# Altium PCB RT_SUPER_B1.PCBdoc (part 3 of 3)
Units mil, origin at the board's own origin, x right, y up, seen from the top; angles counter-clockwise.
Board outline 1617.06 x 1691.18 mil, 4 copper layers (Top Layer, GND, PWR, Bottom Layer), stack 39.556 mil thick; 138 components, 99 nets, 466 pads, 206 vias.
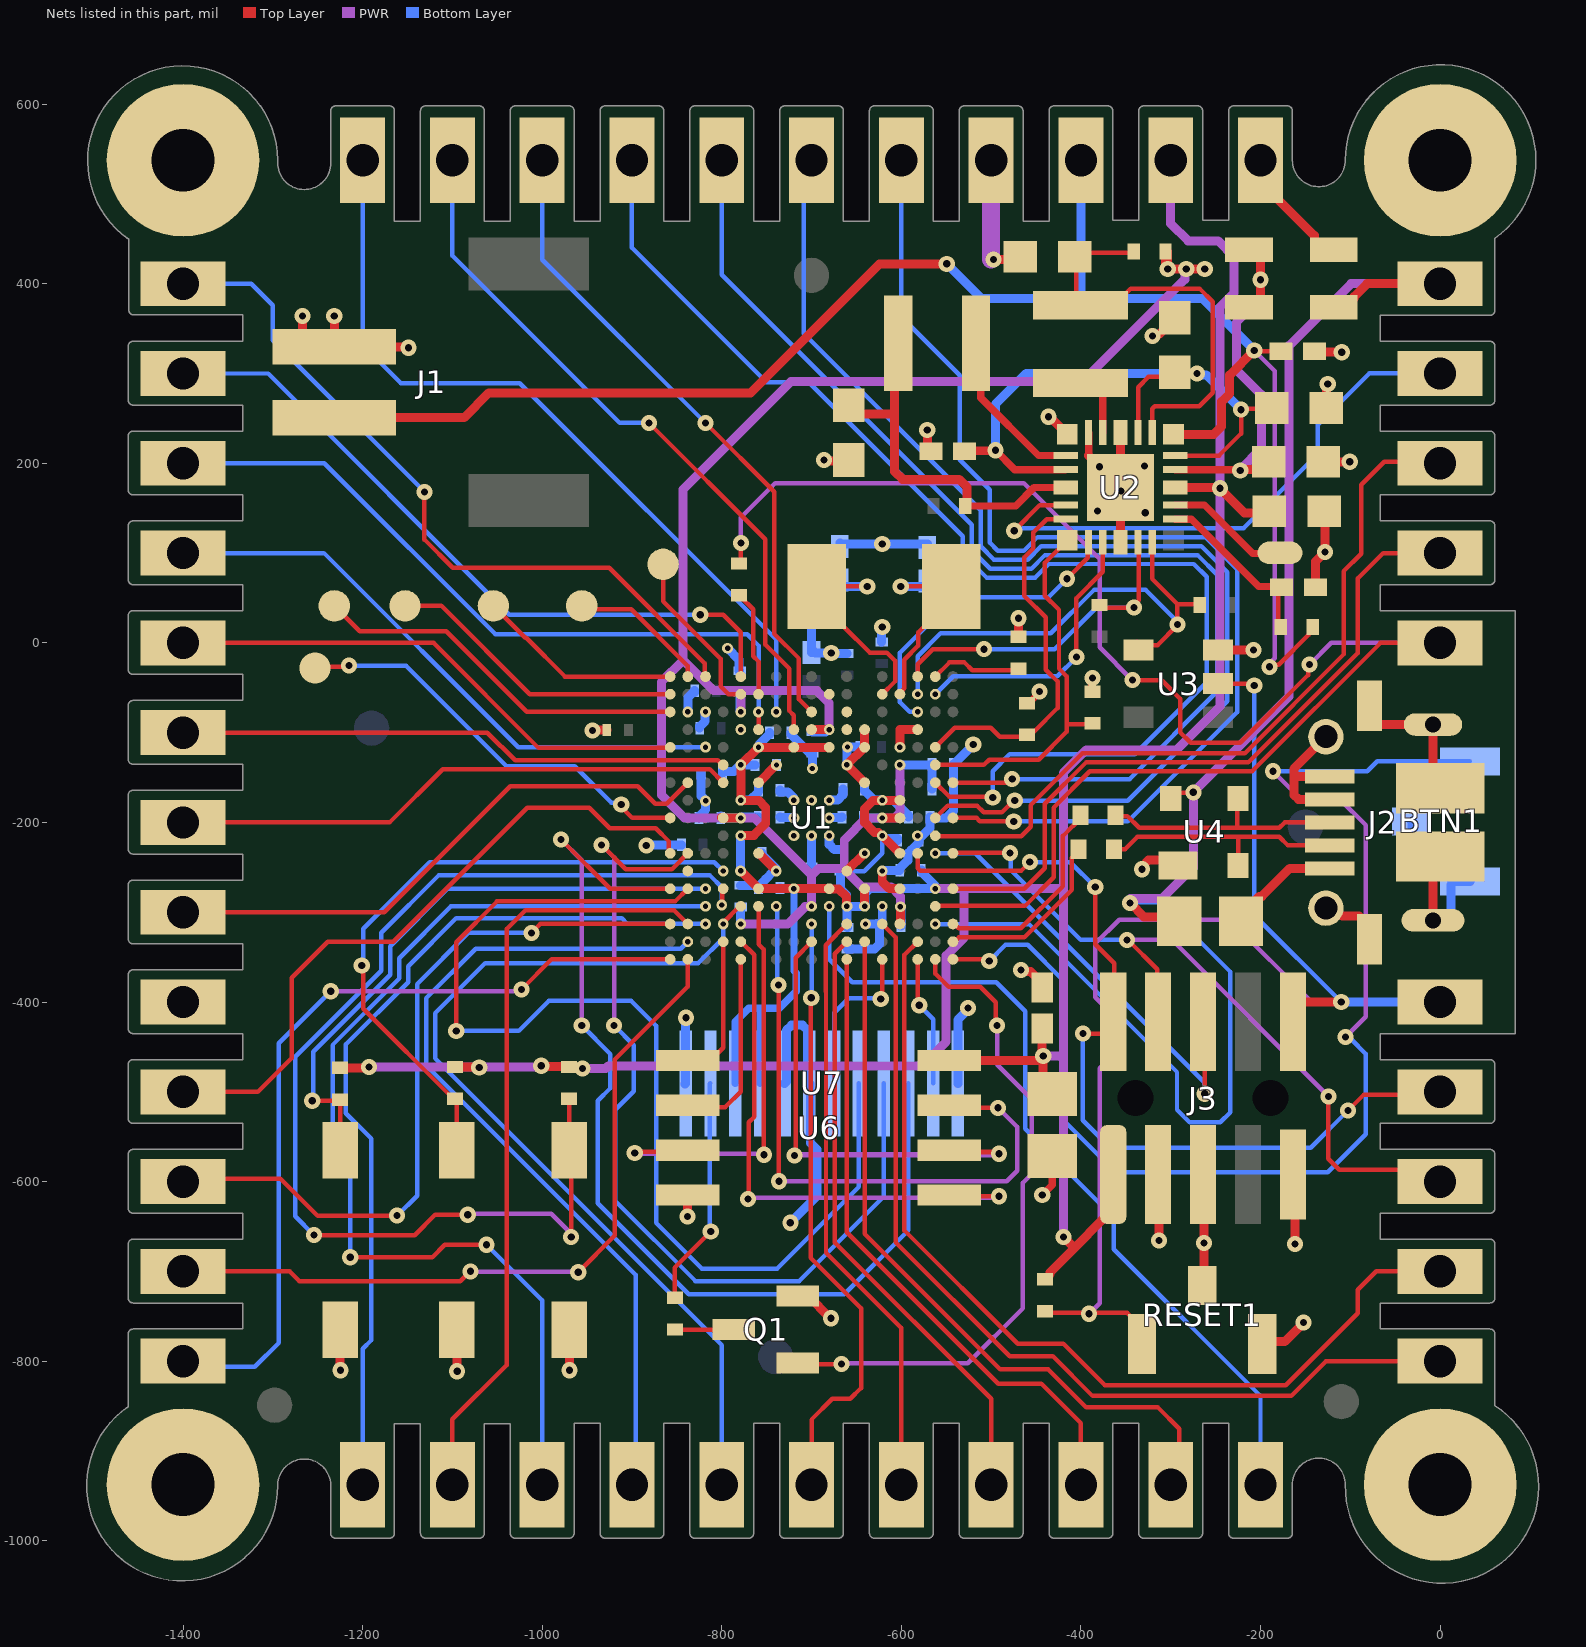
[diagram p4: the nets of this part, all layers, seen from the top]

## Via types
v1: diameter 18, hole 8, Top Layer to Bottom Layer, tented both sides, 133 vias
v2: diameter 12, hole 6, Top Layer to Bottom Layer, tented both sides, 73 vias

## Nets (pads, with @x,y where several pads share a name; then routed paths per layer and width w, separated by ;. In a path a pad name is that pad's centre, name@x,y a point inside that pad or via, vN(x,y) a via of type N, cw(c..) or ccw(c..) an arc to the next point about the centre after c; other vN are vias at no path point) (continued)
+3v3: C12.2 C13.2 C14.2 C15.2 C16.2 C17.2 C18.2 C20.2 C21.2 C22.2 C23.2 C24.2 C25.2 C42.2 C43.1 J3.1 P10.1 R3.2 R4.2 R8.2 R12.2 R13.2 R14.2 U1.E6 U1.E8 U1.E10 U1.F5 U1.H5 U1.H13 U1.H14 U1.K5 U1.K13 U1.L14 U1.M5 U1.N6 U1.N8 U1.N10 U1.N12 U1.N16 U1.P11 U1.P12 U2.15 U6.8 U7.3 U7.4 | length 4300.1
  Top Layer w8: R3.2@-459.84,-67.05 -457.87,-67.05 -450.67,-59.85 -450.67,-58.67 v1(-446,-54) ; R4.2@-387.01,-54.25 -388,-53.26 -388,-40 v1(-387,-39)
  Top Layer w10: R12.2@-1225,-473.28 -1194,-473.28 v1(-1193,-472.28) ; R13.2@-1097,-472.28 -1070.72,-472.28 v1(-1070,-473) ; v1(-1001,-471) -1000.36,-471.64 -970.64,-471.64 -969.06,-473.23 -956.11,-473.23 v1(-955.17,-474.17) ; v2(-779,-254) U1.M5@-778.74,-254.06 U1.M5@-778.74,-254.06 U1.N6@-759.06,-273.74 v2(-719.68,-273.74) U1.N10@-680.31,-273.74 -679.93,-274.12 -669.88,-274.12 -661.01,-282.99 -661.01,-293.04 v2(-660.63,-293.43) ; v2(-778.74,-214.69) -778.36,-214.3 -764.3,-214.3 -751,-201 -751,-183.37 -759.06,-175.32 v2(-778.74,-175.32) v2(-778.74,-135.94) v2(-759.06,-116.26) U1.E8@-719.68,-116.26 U1.E10@-680.31,-116.26 ; v2(-640.94,-293.43) U1.N12@-640.94,-273.74 ; U1.K13@-625.49,-211 -629.94,-211 -640.94,-200 -640.94,-184.94 -631.7,-175.7 -621.64,-175.7 v2(-621.26,-175.32) U1.H14@-601.57,-175.32 ; v2(-621.26,-214.69) U1.L14@-601.57,-234.37 ; U6.8@-546.46,-465 v1@-442,-465 ; v1@-443.11,-458 C43.1@-443.11,-429.25 ; C42.2@-442,-482.94 v1(-442,-460) ; C42.2@-441.8,-484.75 C42.2@-427,-499.55 ; R8.2@-439.93,-706.58 -440.16,-706.81 -438.19,-706.81 -434.33,-702.95 -434.33,-700.98 -408.17,-674.82 ; v1(-419.49,-661.54) -408.17,-672.85 -408.17,-674.82 ; J3.1@-363,-593 -363,-632.28 -372.33,-641.61 -374.96,-641.61 -408.17,-674.82 ; U2.15@-294.96,173.2 -246.35,173.2 -233.22,160.07 -218,144.85 -191.84,144.85 C18.2@-190.16,146.54
  PWR w10: v1(-1193,-472.28) -1002.28,-472.28 v1(-1001,-471) ; v1(-955.17,-474.17) -929.33,-474.17 -926.17,-471 -577,-471 -550,-444 -550,-348.37 -530,-328.37 -530,-273.74 ; v2(-562.2,-273.74) -530,-273.74 ; v1(-442,-460) -423.49,-460 -419.49,-464 ; v1(-419.49,-661.54) -419.49,-464 ; P10.1@-300,537.5 -300,467.01 -280.71,447.72 -247.24,447.72 -229.53,430 -229.53,389.58 -244.98,374.13 -244.98,175.82 -245.28,175.52 -245.28,-70.98 -293.5,-119.21 -394,-119.21 -419.49,-144.7 -419.49,-274 ; -530,-273.74 -419.75,-273.74 -419.49,-274 ; -419.49,-464 -419.49,-274
  Bottom Layer w5: C15.2@-667.52,-254.24 -641.25,-254.24 -621.26,-234.26 v2(-621.26,-214.69)
  Bottom Layer w8: U7.3@-785.03,-490.5 -785.03,-422.03 -770,-407 -758,-407 ; U7.4@-757.47,-490.5 -757.47,-407.53 -758,-407 ; v2(-719.68,-273.74) -719.68,-365.32 -717,-368 -717,-388 -736,-407 -758,-407
  Bottom Layer w10: C16.2@-799,-145 -799,-143.19 -798.92,-143.11 -786.45,-143.11 -779.28,-135.94 v2(-778.74,-135.94) ; v2(-779,-254) C20.2@-779,-234 -778.92,-233.92 -778.92,-214.87 v2(-778.74,-214.69) ; v2(-778.74,-175.32) -778.36,-174.93 -768.12,-174.93 -759,-165.81 C21.2@-759,-164 -759,-162.19 C21.2@-759.08,-162.11 ; v2(-778.74,-135.94) C13.2@-763.03,-135.97 ; v2(-759.06,-116.26) -758.67,-115.88 -758.67,-113.48 -747,-101.81 C17.2@-747,-100 ; C24.2@-735,-273 -735,-273.29 -734.92,-273.37 -720.06,-273.37 v2(-719.68,-273.74) ; C15.2@-667.52,-254.24 -667.52,-274.32 -661.01,-280.83 -661.01,-293.04 v2(-660.63,-293.43) ; C12.2@-660,-317 -660.63,-316.37 v2(-660.63,-293.43) ; C22.2@-641,-163 -641,-164.81 -630.88,-174.93 -621.64,-174.93 v2(-621.26,-175.32) -620.88,-175.7 -608.61,-175.7 -592.12,-192.19 C25.2@-592.12,-194 ; v2(-621.26,-214.69) -620.72,-214.69 -617.29,-218.11 -604.2,-218.11 -604.12,-218.19 C23.2@-604.12,-220 ; C14.2@-577.76,-253.07 -577.76,-254.88 -562.59,-270.06 -562.59,-273.36 v2(-562.2,-273.74) -635.09,-273.74 -640.56,-279.22 -640.56,-293.04 v2(-640.94,-293.43) v2(-660.63,-293.43)
  other v1: -245.28,172.13
+5vUSB: D2.1 L1.2 P12.1 U1.R16 U4.4 | length 1874.8
  Top Layer w5: U4.4@-299.87,-167 -275.35,-167 v1(-274.8,-166.46) ; L1.2@-295.13,-305.32 L1.2@-290.45,-310
  Top Layer w10: v1(-345.24,-289.57) -329.49,-305.32 L1.2@-295.13,-305.32 ; D2.1@-118.31,373.9 -105.51,373.9 -95.73,383.68 -95.73,385.59 -81.32,400 P12.1@0,400
  PWR w10: v1@-344.68,-284.57 -309.25,-284.57 -274.8,-250.12 v1(-274.8,-166.46) -168,-59.65 -168,331.09 -99.09,400 P12.1@0,400
  Bottom Layer w5: v2(-562.2,-313.11) -457.87,-313.11 -293,-477.98 -293,-520 -279,-534 -244.71,-534 -233.46,-522.76 -233.46,-366.54 -311,-289 -344.67,-289 v1(-345.24,-289.57)
+VBATT: C4.2 J1.2 P9.1 R6.2 U2.18 | length 1904.1
  Top Layer w5: v1@-204.94,324.7 C4.2@-181.13,324.7 ; v1(-190.16,-26.69) -187.67,-24.21 -179.8,-24.21 -146.32,9.27 -139.96,15.63 R6.2@-139.96,17.6
  Top Layer w10: J1.2@-1231.5,250.87 -1086.81,250.87 -1059.25,278.43 -767.91,278.43 -624.21,422.13 v1(-549.41,422.13) ; U2.18@-296.93,232.26 -252.07,232.26 -243.31,241.02 -243.31,268.58 -234.45,277.44 -234.45,298.11 v1(-206.89,325.67)
  PWR w5: v1(-206.89,325.67) -184,302.78 -184,-17.02 -190.16,-23.18 v1(-190.16,-26.69)
  Bottom Layer w10: v1(-549.41,422.13) -511.02,383.74 -400,383.74 ; P9.1@-400,537.5 -400,383.74 ; v1(-206.89,325.67) -264.96,383.74 -400,383.74
+VBATT_BU: C3.2 R6.1 U2.13 | length 190.4
  Top Layer w5: C3.2@-180.31,61.89 -180.31,18.58 R6.1@-179.33,17.6
  Top Layer w8: U2.13@-294.96,137.77 -276.86,137.77 -201.97,62.87 C3.2@-180.31,62.87
+VIN: D1.1 P11.1 | length 141
  Top Layer w10: P11.1@-200,537.5 -180,517.5 -180,493.66 -139.88,453.54 -139.88,446.65 -131.1,437.87 D1.1@-118.31,437.87
ADC0_0: P43.1 U1.F4 | length 616.5
  Top Layer w5: P43.1@-1400,-100 -1061,-100 -1030.13,-130.87 -804.59,-130.87 -799.51,-135.94 U1.F4@-798.43,-135.94
ADC0_1: P45.1 U1.E3 | length 671.5
  Bottom Layer w5: P45.1@-1400,100 -1243,100 -1026.74,-116.26 -818.26,-116.26 v2(-818.11,-116.11)
ADC0_8: P44.1 U1.E1 | length 591.3
  Top Layer w5: P44.1@-1400,0 -1121,0 -1004,-117 -858.22,-117 U1.E1@-857.48,-116.26
BTN: BTN1.2 U1.U17 | length 1398.9
  Top Layer w5: U1.U17@-542.52,-352.48 -504.13,-352.48 v1(-502.17,-354.45)
  PWR w5: v1(-186,-143.05) -154.97,-174.09 -111.64,-174.09 -82.87,-202.85 -82.87,-416.46 v1(-105.51,-439.09)
  Bottom Layer w5: v1(-502.17,-354.45) -483.99,-336.28 -459.31,-336.28 -420,-375.59 -420,-531.1 -361.42,-589.69 -125.2,-589.69 -82.87,-547.36 -82.87,-457.8 -99.61,-441.06 -103.54,-441.06 v1(-105.51,-439.09) ; v1(-186,-143.05) -81.05,-143.05 -70.01,-132.01 BTN1.2@33.27,-132.01
DEBUG_RX_IN: P42.1 U1.G4 | length 632.2
  Top Layer w5: P42.1@-1400,-200 -1170,-200 -1110.87,-140.87 -813.19,-140.87 U1.G4@-798.43,-155.63
DEBUG_TX_OUT: P41.1 U1.G2 | length 638.1
  Top Layer w5: P41.1@-1400,-300 -1176.06,-300 -1035.63,-159.57 -893.51,-159.57 -874.08,-179 -861.17,-179 U1.G2@-837.8,-155.63
DM_MCU: R9.2 U1.T17 | length 206.5
  Top Layer w5: U1.T17@-542.52,-332.8 -540.63,-332.8 -535.83,-328 -462.92,-328 -410,-275.08 -410,-239.29 -407.07,-236.36 -405.11,-236.36 -400.72,-231.97 R9.2@-400.72,-230
DP_MCU: R11.2 U1.R17 | length 231.9
  Top Layer w5: U1.R17@-542.52,-313.11 -540.98,-313.11 -536.09,-318 -467.06,-318 -420,-270.94 -420,-215 -409.37,-204.37 -409.11,-204.37 -398.72,-193.97 R11.2@-398.72,-192
FC2_CLK: P48.1 U1.A3 | length 830
  Top Layer w5: v1(-1131.1,168.19) -1131.1,115.04 -1099.61,83.54 -925.39,83.54 -818.97,-22.88 -818.97,-36.66 U1.A3@-818.11,-37.52
  PWR w5: P48.1@-1400,400 P48.1@-1396.57,403.43
  Bottom Layer w5: P48.1@-1400,400 -1324,400 -1300,376 -1300,337.09 v1(-1131.1,168.19)
FC2_SDA: P46.1 U1.D6 | length 818.6
  Top Layer w5: U1.D6@-759.06,-96.57 v2(-759.06,-76.89)
  Bottom Layer w5: P46.1@-1400,200 -1242.64,200 -1052.08,9.44 -771.44,9.44 -759.06,-2.94 v2(-759.06,-76.89)
FC2_WS: P47.1 U1.A5 | length 789.9
  Top Layer w5: v1(-824.02,31.38) -798.43,31.38 -778.74,11.69 U1.A5@-778.74,-37.52
  Bottom Layer w5: P47.1@-1400,300 -1305.24,300 -1036.61,31.38 v1(-824.02,31.38)
FC3_CLK: P1.1 U1.C7 | length 885.6
  Top Layer w20: P1.1@-1200,537.5 P1.1@-1198,535.5
  Bottom Layer w5: P1.1@-1200,537.5 -1200,332 -1157.25,289.25 -1024.8,289.25 -739.37,3.82 v2(-739.37,-76.89)
FC3_SDA: P3.1 U1.C9 | length 738.7
  Top Layer w5: v1(-818.11,244.96) -741.41,168.26 -741.41,9.93 -714,-17.48 -714,-62.89 U1.C9@-700,-76.89
  Bottom Layer w5: P3.1@-1000,537.5 -1000,426.85 v1(-818.11,244.96)
FC3_WS: P2.1 U1.D8 | length 810.6
  Top Layer w5: v1(-881.1,244.96) -751.41,115.27 -751.41,-1.85 -724.61,-28.66 -724.61,-75.86 -719.68,-80.78 U1.D8@-719.68,-96.57
  Bottom Layer w5: P2.1@-1100,537.5 -1100,431.38 -913.58,244.96 v1(-881.1,244.96)
FC4_CLK: U1.D11
FC4_SDA: U1.C11
FC4_WS: U1.B10
FC5_RXD: P6.1 U1.J16 | length 1342.9
  Top Layer w5: U1.J16@-562.2,-195 -548.58,-181.38 -515.64,-181.38 -508.39,-188.63 -487.92,-188.63 -474.96,-175.67 v1(-473.74,-175.67)
  Bottom Layer w5: P6.1@-700,537.5 -708.44,529.06 -708.44,344.44 -511.69,147.69 -511.69,107.58 -496.83,92.72 -459.27,92.72 -444.15,107.83 -265.99,107.83 -237,78.84 -237,-65 -347.67,-175.67 v1(-473.74,-175.67)
FC5_SCK: P4.1 U1.G16 | length 1410
  Top Layer w5: U1.G16@-562.2,-155.63 -546.46,-171.38 -498.98,-171.38 v1(-498.23,-172.13)
  Bottom Layer w5: P4.1@-900,537.5 -900,440.04 -750.2,290.24 -703.24,290.24 -531.69,118.69 -531.69,99.29 -505.12,72.72 -450.98,72.72 -435.87,87.83 -274.28,87.83 -260,73.56 -260,-44 -340.13,-124.13 -479.53,-124.13 -498.23,-142.83 v1(-498.23,-172.13)
FC5_SSEL0: P7.1 U1.J17 | length 1294.6
  Top Layer w5: U1.J17@-542.52,-195 -516.16,-195 -512.53,-198.63 -475.13,-198.63 v1(-474.86,-198.9)
  Bottom Layer w5: P7.1@-600,537.5 -600,363.07 -535,298.07 -535,204 -501.69,170.69 -501.69,111.72 -492.69,102.72 -463.41,102.72 -448.29,117.83 -261.85,117.83 -226,81.98 -226,-77 -347.63,-198.63 -474.59,-198.63 v1(-474.86,-198.9)
FC5_TXD: P5.1 U1.G17 | length 1311.1
  Top Layer w5: U1.G17@-542.52,-155.63 v1@-482.63,-155.63 ; v1@-481,-154 -478.69,-151.69 v1(-476.57,-151.69)
  Bottom Layer w5: P5.1@-800,537.5 -800,410 -521.69,131.69 -521.69,103.43 -500.98,82.72 -455.13,82.72 -440.01,97.83 -270.13,97.83 -248,75.7 -248,-54 -345.69,-151.69 v1(-476.57,-151.69)
GND: BTN1.1 BTN1.S C1.1 C2.2 C3.1 C4.1 C5.2 C6.1 C7.1 C8.2 C9.1 C10.1 C11.1 C12.1 C13.1 C14.1 C15.1 C16.1 C17.1 C18.1 C19.1 C20.1 C21.1 C22.1 C23.1 C24.1 C25.1 C26.1 C27.1 C28.1 C29.1 C30.1 C31.1 C32.1 C33.1 C34.1 C35.1 C36.1 C37.1 C38.1 C39.1 C40.1 C41.1 C42.1 C43.2 J1.1 J2.4 J2.5 J2.MOUNT J3.3 J3.5 J3.9 P8.1 P40.1 pad.2 Q1.2 R1.1 RESET1.1 RESET1.S SW1.1 SW2.1 SW3.1 U1.C2 U1.C3 U1.D5 U1.D12 U1.D15 U1.E12 U1.E14 U1.F7 U1.F11 U1.G6 U1.G12 U1.H8 U1.H9 U1.H10 U1.J8 U1.J10 U1.K8 U1.K9 U1.K10 U1.L6 U1.L12 U1.M7 U1.M11 U1.M13 U1.N14 U1.P13 U2.9 U2.21 U2.23 U2.24 U2.25 U3.3 U4.1 U6.4 U7.1 U7.5 U7.6 U7.12 | length 3976.1
  Top Layer w8: v1(-443.11,-615) -432,-603.89 C42.1@-432,-571.45 ; U2.25@-391.36,208.57 U2.23@-391.36,234.16
  Top Layer w10: v1(-1266.93,364.06) -1266.93,346.79 -1249.74,329.61 J1.1@-1231.5,329.61 ; v1(-1231.5,364.06) J1.1@-1231.5,329.61 ; SW1.1@-1225,-765 -1225,-806.81 -1224.61,-807.2 v1(-1224.61,-810.16) ; v1(-1148.82,328.62) -1149.8,329.61 J1.1@-1231.5,329.61 ; SW2.1@-1095,-765 -1094.68,-765.32 v1(-1094.68,-811.14) ; SW3.1@-970,-765 -969.68,-765.32 v1(-969.68,-810.16) ; v1(-944.09,-97.56) -943.54,-97 C6.1@-928,-97 ; v1(-838,-639) -838,-615.2 U6.4@-837.8,-615 ; U1.G6@-759.06,-155.63 U1.F7@-739.43,-136 ; U1.L6@-758.51,-234.37 U1.L6@-759.06,-234.37 v2(-739.37,-254.06) ; U1.F7@-739.37,-135.94 -739.06,-135.94 v2(-739,-136) ; Q1.2@-715.57,-727.24 -703.76,-727.24 -678.91,-752.09 v1(-678.35,-752.09) ; v1(-686.22,203.62) -685.24,202.64 -659.65,202.64 C9.1@-658.66,203.62 ; U1.M11@-660.63,-254.06 v2(-640.94,-234.37) ; U1.G12@-640.94,-155.63 v2(-660.63,-135.94) U1.E12@-640.94,-116.26 U1.E12@-640.94,-116.26 -641,-96.63 U1.D12@-640.94,-96.57 ; v2(-621.26,-254.06) -621.26,-265.87 -613.39,-273.74 U1.N14@-601.57,-273.74 ; v2(-601.57,-116.26) -601.57,-96.57 U1.D15@-581.89,-96.57 ; C8.2@-571.57,213.97 -571.06,213.46 v1(-571.06,237.09) ; v1(-497.24,427.05) -470.67,427.05 C7.1@-467.72,430 ; R1.1@-469.68,8.74 v1(-469.68,27.44) ; v1(-466.73,-364.29) -465.2,-365.82 -456.34,-365.82 -443.11,-379.06 C43.2@-443.11,-383.98 ; v1(-436.22,251.85) -434.64,251.85 U2.24@-415.04,232.26 ; U2.25@-391.36,208.57 U2.25@-355.99,173.2 ; U2.9@-355.99,112.18 U2.25@-355.99,169.65 ; U2.21@-355.99,234.22 U2.25@-355.99,173.2 ; v1(-355.51,169.17) U2.25@-355.99,169.65 ; v1(-331.89,-252.09) -331.89,-249.13 -324.56,-241.8 U4.1@-292,-241.8 ; v1(-320.42,341.76) -318.89,343.29 -313.42,343.29 -295.49,361.23 C5.2@-295.49,362.21 ; v1(-313.19,-665.47) -313,-665.28 J3.3@-313,-593 ; RESET1.S@-264.96,-715.67 -263,-713.71 v1(-263,-668.43) J3.5@-263,-593 ; U3.3@-247.24,-7.99 v1(-207.87,-7.99) ; RESET1.1@-198.03,-780.63 -195.54,-778.14 -173.14,-778.14 v1(-152,-757) ; J3.9@-163,-593 -161.61,-594.39 v1(-161.61,-669.41) ; C4.1@-135.85,324.7 -134.85,323.7 v1(-109.45,323.7) ; C3.1@-135.04,61.89 -135.04,62.8 -138.98,66.73 -138.98,90.43 v1(-128.15,101.26) -128.15,145.55 C18.1@-129.13,146.54 ; C1.1@-129.98,201.7 C1.1@-129.98,201.7 v1(-100.59,201.65) ; J2.MOUNT@-127.17,-295.47 -117.86,-295.47 -108.97,-304.37 -90.02,-304.37 -78.74,-315.65 J2.MOUNT@-78.74,-329.92 ; J2.MOUNT@-127.17,-104.53 -162.83,-140.19 -162.83,-148.74 ; C2.2@-126.57,261.7 -126.57,286.9 v1(-125.2,288.27) ; J2.4@-122.87,-174.41 -157.6,-174.41 -162.83,-169.18 -162.83,-148.74 ; J2.5@-122.87,-148.82 -162.75,-148.82 -162.83,-148.74 ; J2.MOUNT@-78.74,-70.08 -78.74,-79.67 -67.46,-90.94 J2.MOUNT@-7.87,-90.94 -7.87,-154.23 J2.MOUNT@0,-162.11 ; J2.MOUNT@-7.87,-309.06 -7.87,-245.77 J2.MOUNT@0,-237.89 ; U2.25@-355.99,169.65 U2.25@-355.99,173.2
  PWR w5: v1@-500,427.05 v1(-497.24,427.05)
  PWR w20: v1@-500,427.05 P8.1@-500,537.5
  Bottom Layer w5: C38.1@-830.11,-55.24 C38.1@-830.11,-55.08
  Bottom Layer w10: v1(-884,-225.59) -883.7,-225.3 -845.08,-225.3 -845,-225.22 C40.1@-845,-225 ; U7.1@-840.75,-491.1 U7.1@-840.15,-490.5 -840.15,-417.83 v1(-839.76,-417.44) ; v2(-837.8,-76.89) -837.8,-61.09 -831.86,-55.16 -830.19,-55.16 -830.11,-55.08 C38.1@-830.11,-53.27 ; C30.1@-825.19,-195 -825.19,-193.03 -817.93,-185.77 v2(-818,-176) v2(-818,-176) -818,-175.46 -823,-170.46 C16.1@-823,-145 ; C39.1@-824.59,-95 -824.59,-93.19 -818.49,-87.09 -818.49,-77.27 v2(-818.11,-76.89) ; v2(-793.5,-6.02) -780.83,-18.7 -780.83,-30.92 -780.75,-31 C33.1@-780,-31 ; C32.1@-777.19,-270 C32.1@-779,-270 C32.1@-779,-270 -760.11,-270.08 C24.1@-759,-271.19 ; C24.1@-759,-273 C24.1@-759,-271.19 ; C20.1@-755,-234 -755,-235.81 -739.75,-251.06 -739.75,-253.67 v2(-739.37,-254.06) -739.75,-254.44 -742.39,-254.44 -751.13,-263.18 -751.13,-263.32 C24.1@-759,-271.19 ; C29.1@-735,-194 -734.5,-194.5 -720.18,-194.5 v2(-719.68,-195) ; C21.1@-735,-164 -735,-165.81 -734.92,-165.89 -726.62,-165.89 -720.07,-172.44 -720.07,-174.93 v2(-719.68,-175.32) ; U7.5@-729.91,-490.5 -728.02,-488.61 -728.02,-431.56 -722.17,-425.7 -710.1,-425.7 -704.24,-431.56 -704.24,-488.61 -701.44,-491.41 -701.44,-556.75 -694.09,-564.09 -694.09,-616.26 v1(-723.62,-645.79) ; C17.1@-723,-100 -723,-101.81 -701.89,-122.92 -699.08,-122.92 C34.1@-699,-123 v2@-699,-139.87 ; C27.1@-700,-249.74 v2(-700,-214.69) ; C10.1@-700,-10.94 C10.1@-700,-7.01 ; v2(-680.31,-214.69) -680.31,-224.39 -674.46,-230.24 C15.1@-667.52,-230.24 ; v2(-680.31,-195) -679.81,-194.5 -666.5,-194.5 C28.1@-666,-194 ; v2(-680.31,-175.32) -680.07,-175.07 -670.86,-175.07 -665,-169.22 C22.1@-665,-163 ; C19.1@-668.5,107.17 -672.16,103.51 -687.49,103.51 -700,91 C10.1@-700,-7.01 ; C19.1@-668.5,111.1 -667.52,110.12 v1(-621.26,110.12) C11.1@-571.06,110.12 ; v2@-661.05,-134.99 -660.63,-135.4 v2(-660.63,-135.94) -660.31,-135.63 -660.31,-116.32 v2(-660,-116) C41.1@-646,-116 ; C36.1@-660.43,-11.82 -660.51,-11.74 -677.68,-11.74 v1(-678,-11.43) -695.58,-11.43 C10.1@-700,-7.01 ; C12.1@-660,-341 -630.07,-341 -624.21,-335.14 -624.21,-317.08 -624.4,-316.89 C31.1@-624.4,-315.08 C31.1@-624.4,-313.27 ; v2(-639.96,-313.11) -630.26,-313.11 -630.18,-313.19 -624.48,-313.19 C31.1@-624.4,-313.27 ; C37.1@-622,1.06 -622,16.86 v1(-621.26,17.6) ; v2(-621.26,-293.43) -621.26,-310.13 C31.1@-624.4,-313.27 ; v2(-621.26,-254.06) -620.77,-253.56 -602.26,-253.56 C14.1@-601.76,-253.07 -601.76,-251.26 -592.69,-242.18 -592.69,-234.52 -589.2,-231.03 -589.2,-230.89 -580.12,-221.81 C23.1@-580.12,-220 C23.1@-580.12,-218.19 ; v2(-581.89,-214.69) -581.89,-216.42 C23.1@-580.12,-218.19 ; C25.1@-568.12,-194 C25.1@-568.2,-194.84 ; U7.12@-537,-490.5 -537,-419.8 -525.92,-408.72 v1(-525.92,-406.75) ; v1@-519.91,-113.31 -541.61,-135 C26.1@-542,-135 C35.1@-542,-163 -542,-187 -550,-195 -568.04,-195 C25.1@-568.2,-194.84 ; BTN1.S@-31.69,-198.94 -31.06,-199.57 -31.06,-219.26 BTN1.1@15.55,-265.87 ; J2.MOUNT@-7.87,-309.06 5.71,-309.06 12,-302.76 12,-269.42 BTN1.1@15.55,-265.87 ; BTN1.1@33.27,-265.87 BTN1.1@15.55,-265.87 ; C23.1@-580.12,-218.19 -568.2,-206.27 C25.1@-568.2,-194.84
  other v1: -519.88,-113.31 -328.3,144.93 -381.45,146.9 -379.48,196.11 -329.29,197.1
  other v2: -719.68,-214.69 -700,-175.32 -699.02,-139.88 -778.74,-96.57
HS_SPI_MISO: U1.M2
HS_SPI_MOSI: U1.N1 U7.10 | length 1159.2
  Top Layer w5: v1(-979,-219) -924.26,-273.74 U1.N1@-857.48,-273.74
  PWR w5: v1(-979,-219) -956,-242 v1(-956,-426)
  Bottom Layer w5: v1(-956,-426) -924,-458 -924,-495.77 -938.19,-509.96 -938.19,-624.13 -836.81,-725.51 -663.58,-725.51 -592.12,-654.05 U7.10@-592.12,-490.5
HS_SPI_SCK: U1.L2 U7.9 | length 1035.5
  Top Layer w5: v1(-934,-225) -907,-252 -855.43,-252 U1.L2@-837.8,-234.37
  PWR w5: v1(-934,-225) -920,-239 v1(-920,-426)
  Bottom Layer w5: v1(-920,-426) -898,-448 -898,-499.3 -918.5,-519.8 -918.5,-621.5 -829.25,-710.75 -713.78,-710.75 -619.68,-616.65 U7.9@-619.68,-490.5
HS_SPI_SSEL0: U1.N2 U7.8 | length 1249.1
  Top Layer w5: v1(-1095.67,-432.2) -1095.67,-333.28 -1050.39,-288 -852.06,-288 U1.N2@-837.8,-273.74
  Bottom Layer w5: v1(-1095.67,-432.2) -1026.2,-432.2 -992.5,-398.5 -901.03,-398.5 -873.23,-426.3 -873.23,-645.79 -822.05,-696.97 -738.39,-696.97 -647.24,-605.82 U7.8@-647.24,-490.5
I3C0_PUR: R16.1 U1.B6 | length 118.4
  Top Layer w5: R16.1@-780.71,51.06 -778.74,51.06 -764.96,37.28 -764.96,-14.88 -759.06,-20.79 U1.B6@-759.06,-57.2
I3C0_SCL: P15.1 U1.N17 | length 788
  Top Layer w5: U1.N17@-542.52,-273.74 -463.08,-273.74 -440.39,-251.05 -440.39,-179.27 -394.27,-133.15 -213.57,-133.15 -91.73,-11.31 -91.73,71.73 -63.46,100 P15.1@0,100
I3C0_SDA: P16.1 R16.2 U1.P16 | length 1825.2
  Top Layer w5: R16.2@-780.71,90.43 -778.74,92.4 v1(-778.74,111.1) ; U1.P16@-562.2,-293.43 -561.78,-293 -462.37,-293 -430.39,-261.02 -430.39,-183.41 -390.13,-143.15 -209.43,-143.15 -66.4,-0.12 -0.12,-0.12 P16.1@0,0 ; v1(-342.72,-41.46) -342.44,-41.74 -309.96,-41.74 -289.57,-62.13 -289.57,-99.53 -277.76,-111.34 -222.54,-111.34 -147.07,-35.87 -147.07,-25.93 v1(-145.37,-24.23)
  PWR w5: v1(-778.74,111.1) -778.74,139.65 -740.35,178.03 -463.78,178.03 -379.13,93.39 -379.13,-5.04 v1(-342.72,-41.46) ; v1(-145.37,-24.23) -121.14,0 P16.1@0,0
ISP0: R12.1 SW1.2 U1.N3 | length 669.6
  Top Layer w5: v1(-1256.12,-510.02) R12.1@-1225.66,-510.02 ; R12.1@-1225,-508.72 SW1.2@-1225,-565 SW1.2@-1224,-564
  Bottom Layer w5: v1@-1255.12,-506.02 -1255.12,-455.39 -1169.29,-369.56 -1169.29,-337.81 -1105.48,-274 -818.37,-274 v2(-818.11,-273.74)
ISP1: R13.1 SW2.2 U1.M4 | length 728
  Top Layer w5: v1(-1200.89,-359.46) -1199.23,-361.12 -1199.23,-407.45 -1100.91,-505.77 -1098.91,-505.77 -1095,-509.69 SW2.2@-1095,-565
  Bottom Layer w5: v1(-1200.89,-359.46) -1199.23,-357.8 -1199.23,-318.25 -1125.2,-244.21 -808.27,-244.21 v2(-798.43,-254.06)
ISP2: R14.1 SW3.2 U1.N4 | length 1296.4
  Top Layer w5: v1(-1254.13,-659.57) -1141.93,-659.57 -1119.29,-636.93 v1(-1082.87,-636.93) ; R14.1@-970,-509.69 SW3.2@-970,-565 -967.72,-567.28 v1(-967.72,-661.54) ; v2(-799.95,-291.9) -799.19,-291.13 -799.19,-274.5 U1.N4@-798.43,-273.74
  PWR w5: v1(-1082.87,-636.93) -1081.89,-635.94 -989.79,-635.94 -967.72,-658.02 v1(-967.72,-661.54)
  Bottom Layer w5: v1(-1254.13,-659.57) -1275,-638.7 -1275,-460.94 -1179.29,-365.24 -1179.29,-322.91 -1115.38,-259 -813.17,-259 -799.95,-272.21 v2(-799.95,-291.9)
LCD_BL: Q1.1 U1.U16 | length 735.2
  Top Layer w5: Q1.1@-715.57,-802.05 -714.35,-803.27 v1(-666.54,-803.27) ; U1.U16@-562.2,-352.48 -562.2,-368.23 -547.44,-382.99 -512.01,-382.99 -494.84,-400.16 -494.84,-424.77 v1(-493.31,-426.3)
  PWR w5: v1(-666.54,-803.27) -665.63,-802.36 -525.87,-802.36 -464.76,-741.26 -464.76,-601.5 -454.76,-591.5 -454.76,-508.24 -493.31,-469.69 v1(-493.31,-426.3)
LCD_CMD_DATA: U1.U13 U7.7 | length 182.5
  Top Layer w5: v1(-623,-396.77) -621.26,-395.04 U1.U13@-621.26,-352.48
  Bottom Layer w5: U7.7@-674.8,-490.5 -674.8,-411.92 -658.66,-395.79 -623.98,-395.79 v1(-623,-396.77)
LCD_RST: U1.U15 U7.11 | length 145.2
  Top Layer w5: U1.U15@-581.89,-352.48 -581.89,-401.69 v1(-580,-403.59)
  Bottom Layer w5: v1(-580,-403.59) -564.56,-419.02 U7.11@-564.56,-490.5
MCLK: P14.1 U1.K16 | length 849.3
  Top Layer w5: U1.K16@-562.2,-214.69 -561.49,-215.4 -466.46,-215.4 -455.91,-204.84 -455.91,-180.64 -398.41,-123.15 -217.72,-123.15 -107.48,-12.91 -107.48,79.61 -87.8,99.29 -87.8,176.06 -62.2,201.65 -1.65,201.65 P14.1@0,200
NetC1_2: C1.2 D1.2 D2.2 U2.16 | length 431.9
  Top Layer w8: U2.16@-294.87,192.8 v1@-223.3,192.8
  Top Layer w10: v1@-223.3,192.8 v1(-222.64,192.13) ; v1@-222.64,192.89 -199.81,192.89 C1.2@-191,201.7 ; D2.2@-212.8,373.9 -208.78,373.9 -200,382.68 v1(-200,404.41) -200,429.09 -208.78,437.87 D1.2@-212.8,437.87
  PWR w10: v1(-222.64,192.13) -222.64,192.89 -199.02,216.51 -199.02,276.46 -227,304.44 -227,357 -200,384 v1(-200,404.41)
NetC2_1: C2.1 C5.1 C8.1 U2.2 U2.17 U2.20 | length 739.8
  Top Layer w5: U2.20@-336.3,234.22 -336.3,284.84 -325,296.14 -296.35,296.14 -292.41,300.08 v1(-270.87,300.08) ; U2.17@-294.96,208.63 -246.17,208.63 -221.65,233.15 v1(-221.65,259.72) ; v1@-220.67,260.71 -188.58,260.71 C2.1@-187.59,261.7
  Top Layer w8: v1(-495.28,214.45) -473.74,192.92 ; -473.74,192.89 U2.2@-417.01,192.89
  Top Layer w10: C8.1@-525.79,213.46 -525.3,213.96 -495.77,213.96 v1(-495.28,214.45)
  Bottom Layer w10: v1(-495.28,214.45) -495.28,265.63 -460.83,300.08 v1(-270.87,300.08) -269.34,298.55 -260.48,298.55 v1(-221.65,259.72)
NetC7_2: C7.2 L2.2 R7.1 U2.19 | length 486.4
  Top Layer w5: R7.1@-343.17,435.7 -344.17,434.7 -404.98,434.7 -404.98,380.5 L2.2@-400.49,376.01 -363.09,376.01 -344.53,394.57 -267.91,394.57 -253.15,379.8 -253.15,278.66 -268.15,263.66 -317.63,263.66 -320.56,260.73 U2.19@-320.56,234.22
NetC9_2: C9.2 L3.2 R10.1 U2.3 | length 439.1
  Top Layer w8: R10.1@-522.54,152.44 -472.64,152.44 -451.88,173.2 U2.3@-417.01,173.2
  Top Layer w10: C9.2@-658.66,264.65 -648.82,254.8 -607.48,254.8 ; L3.2@-608.79,313.81 L3.2@-597.04,325.56 ; L3.2@-603.54,333.54 -607.48,329.61 -607.48,313.81 -607.48,254.8 ; R10.1@-526.77,152.44 -526.77,173.11 -535.63,181.97 -598.62,181.97 -607.48,190.83 -607.48,254.8
NetC11_2: C11.2 U1.B14 U5.2 | length 230.2
  Top Layer w5: U1.B14@-601.57,-57.2 -601.57,-55.7 -596.65,-50.78 -596.65,-18.65 -581,-3 -581,11.62 -544.49,48.13 U5.2@-544.49,62.87 v1(-600.59,62.87)
  Bottom Layer w5: C11.2@-573.03,62.87 C11.2@-571.06,64.84
  Bottom Layer w10: v1(-600.59,62.87) C11.2@-573.03,62.87
NetC19_2: C19.2 U1.B13 U5.1 | length 261
  Top Layer w5: v1(-637.99,62.87) U5.1@-694.09,62.87 -664.09,32.87 -664.09,18.09 -635,-11 -616,-11 -607,-20 -607,-42.94 U1.B13@-621.26,-57.2
  Bottom Layer w5: C19.2@-668.5,65.83 C19.2@-665.55,62.87
  Bottom Layer w10: C19.2@-665.55,62.87 v1(-637.99,62.87)
NetJ2_1: J2.1 L1.1 | length 122.1
  Top Layer w10: L1.1@-221,-305 -221,-302.05 -201.39,-282.44 -198.44,-282.44 -167.18,-251.18 J2.1@-122.87,-251.18
NetJ2_2: J2.2 R9.1 U4.2 | length 281.1
  Top Layer w5: R9.1@-361.89,-229.64 -350.64,-229.64 -337,-216 -226,-216 ; U4.2@-225,-248 -225,-217 -226,-216 ; J2.2@-122.87,-225.59 -169.41,-225.59 -179,-216 -226,-216
NetJ2_3: J2.3 R11.1 U4.3 | length 281.9
  Top Layer w5: R11.1@-363.28,-192 -362.28,-193 -348.2,-193 -335.2,-206 -226,-206 ; U4.3@-225,-173.2 -226,-174.2 -226,-206 ; J2.3@-122.87,-200 -173,-200 -179,-206 -226,-206
NetL2_1: L2.1 U2.22 | length 73.1
  Top Layer w8: U2.22@-375.67,234.22 L2.1@-375.67,277.65
  Top Layer w10: L2.1@-400.49,289.39 -387.42,289.39 L2.1@-375.67,277.65
NetL3_1: L3.1 U2.1 | length 183.9
  Top Layer w8: L3.1@-511.58,328.2 -511.58,273.08 -447.14,208.63 U2.1@-417.01,208.63
  Top Layer w10: L3.1@-516.93,333.54 L3.1@-511.58,328.2
NetQ1_3: Q1.3 R15.1 | length 59
  Top Layer w5: R15.1@-845.27,-765 -786.79,-765 Q1.3@-786.43,-764.64
NetR1_2: R1.2 U1.A16 | length 102.7
  Top Layer w5: U1.A16@-562.2,-37.52 -546.46,-21.77 -529.72,-21.77 -520.87,-30.63 R1.2@-469.68,-30.63
NetR15_2: R15.2 U7.2 | length 255.3
  Top Layer w5: R15.2@-852.56,-728.46 -852.56,-695.98 v1(-812.2,-655.63)
  Bottom Layer w5: U7.2@-812.59,-490.5 -813.19,-491.1 -813.19,-654.65 v1(-812.2,-655.63)
NetTP2_1: TP2.1 U1.J1 | length 468.5
  Top Layer w5: TP2.1@-1253,-28 -1251.69,-26.69 -1216.31,-26.69 v1(-1215,-25.37) ; v1(-912,-180) -912,-182.8 -899.8,-195 U1.J1@-857.48,-195
  Bottom Layer w5: v1(-1215,-25.37) -1151.63,-25.37 -1039.7,-137.3 -963.7,-137.3 -923.17,-177.83 -914.17,-177.83 v1(-912,-180)
NetTP3_1: TP3.1 U1.C1 | length 422.9
  Top Layer w5: TP3.1@-1231.5,41.22 -1203.28,13 -1107,13 -1017.11,-76.89 U1.C1@-857.48,-76.89
NetTP4_1: TP4.1 U1.A1 | length 229.5
  Top Layer w5: TP4.1@-1054.33,41.22 -1018.9,5.79 -1017.91,5.79 -974.61,-37.52 U1.A1@-857.48,-37.52
NetTP5_1: TP5.1 U1.A2 | length 156
  Top Layer w5: TP5.1@-955.91,37.28 -900.79,37.28 -837.8,-25.71 U1.A2@-837.8,-37.52
PDM_CLK01: P38.1 U1.R1 | length 833.7
  Top Layer w5: P38.1@-1400,-600 -1396.57,-596.57 -1291.54,-596.57 -1250.2,-637.91 v1(-1161.61,-637.91) ; v1(-1012.01,-322.95) -1002.06,-313 -857.59,-313 U1.R1@-857.48,-313.11
  Bottom Layer w5: v1(-1161.61,-637.91) -1139.29,-615.59 -1139.29,-379.99 -1082.25,-322.95 v1(-1012.01,-322.95)
PDM_CLK23: P36.1 U1.U1 | length 940.9
  Top Layer w5: v1(-1023.07,-385.94) -989.6,-352.48 U1.U1@-857.48,-352.48
  PWR w5: v1(-1235.43,-387.91) -1025.04,-387.91 v1(-1023.07,-385.94)
  Bottom Layer w5: P36.1@-1400,-800 -1406.22,-806.22 -1320.08,-806.22 -1293.5,-779.65 -1293.5,-445.98 v1(-1235.43,-387.91)
PDM_CLK45: P34.1 U1.R2 | length 860.5
  Top Layer w5: P34.1@-1100,-937.5 -1100,-864.69 -1039.57,-804.25 -1039.57,-318.57 -1019,-298 -852.91,-298 U1.R2@-837.8,-313.11
PDM_CLK67: P32.1 U1.T2 | length 957.6
  Bottom Layer w5: P32.1@-900,-937.5 -895.87,-933.37 -895.87,-703.96 -1129.29,-470.54 -1129.29,-395.94 -1074.02,-340.67 -845.67,-340.67 v2(-837.8,-332.8)
PDM_DATA01: P37.1 U1.U2 | length 848.7
  Top Layer w5: P37.1@-1400,-700 -1281.31,-700 -1270.31,-711 -1091.35,-711 -1080.27,-699.92 v1(-1079.92,-699.92) ; v1(-959.84,-700.91) -919,-660.06 -919,-464 -837.8,-382.8 U1.U2@-837.8,-352.48
  PWR w5: v1(-1079.92,-699.92) -1079.43,-700.41 -960.33,-700.41 v1(-959.84,-700.91)
PDM_DATA23: P35.1 U1.R3 | length 985.2
  Top Layer w5: P35.1@-1205,-932.5 P35.1@-1200,-937.5
  Bottom Layer w5: P35.1@-1200,-937.5 -1200,-786.28 -1190.16,-776.44 -1190.16,-552.28 -1218.7,-523.74 -1218.7,-447.26 -1149.29,-377.85 -1149.29,-360.18 -1095.57,-306.45 -911.55,-306.45 -905,-313 -818.22,-313 v2(-818.11,-313.11)
PDM_DATA45: P33.1 U1.P3 | length 1187.3
  Top Layer w5: v1(-1213.78,-684.17) -1122.24,-684.17 -1108.46,-670.39 v1(-1061.97,-670.39)
  Bottom Layer w5: v1(-1213.78,-684.17) -1213.78,-561.56 -1233.46,-541.87 -1233.46,-447.88 -1159.29,-373.7 -1159.29,-351.14 -1101.57,-293.43 v2(-818.11,-293.43) ; v1(-1061.97,-670.39) -1000,-732.37 P33.1@-1000,-937.5
PDM_DATA67: P31.1 U1.P5 | length 1061.5
  Top Layer w5: P31.1@-803,-934.5 P31.1@-800,-937.5 ; v2(-798.43,-313.11) -798.43,-311.58 -780.27,-293.43 U1.P5@-778.74,-293.43
  Bottom Layer w5: P31.1@-800,-937.5 -800,-782.01 -1119.29,-462.72 -1119.29,-412.52 -1063.35,-356.57 -826.14,-356.57 -798.43,-328.86 v2(-798.43,-313.11)
PIO0_11: P39.1 U1.L1 | length 753.9
  Top Layer w5: P39.1@-1400,-500 -1316.58,-500 -1279,-462.42 -1279,-373 -1238.8,-332.8 -1165.8,-332.8 -1016.57,-183.57 -947.67,-183.57 -924.74,-206.5 -873.54,-206.5 -858.82,-221.22 -858.82,-233.03 U1.L1@-857.48,-234.37
PIO1_8: TP6.1 U1.B5 | length 188.6
  Top Layer w5: TP6.1@-865.35,87.48 -865.35,46.35 -801.38,-17.62 -801.38,-48.35 -792.52,-57.2 U1.B5@-778.74,-57.2
PIO1_9: TP7.1 U1.B1 | length 336
  Top Layer w5: TP7.1@-1152.76,41.22 -1112.22,41.22 -1013.8,-57.2 U1.B1@-857.48,-57.2
PMIC_INTB: R2.1 U1.A15 U2.10 | length 384.5
  Top Layer w5: U1.A15@-581.89,-37.52 -581.89,-23.74 -565.16,-7.01 v1(-508.07,-7.01) ; R2.1@-379.67,39.78 -375.3,39.78 -374.77,39.25 v1(-340.75,39.25) ; U2.10@-336.3,112.18 -335.83,111.7 -335.83,47.31
  Bottom Layer w5: v1(-508.07,-7.01) -429.33,-7.01 -383.07,39.25 v1@-341.5,39.25
PMIC_MODE0: U1.C15 U2.7 | length 350.2
  Top Layer w5: v1(-415.59,71.33) -392.24,94.68 -392.24,111.35 U2.7@-391.42,112.18
  Bottom Layer w5: v2(-581.89,-76.89) -582.01,-76.77 -590.86,-76.77 -601.57,-66.06 -601.57,-10.94 -539.57,51.06 -435.86,51.06 v1(-415.59,71.33)
PMIC_MODE1: U1.B16 U2.8 | length 314.5
  Top Layer w5: v1(-404.96,-15.87) -404.96,49.85 -375.67,79.13 U2.8@-375.67,112.18
  Bottom Layer w5: v2(-562.2,-57.2) -542.11,-37.11 -426.2,-37.11 v1(-404.96,-15.87)
PMIC_ON: P13.1 U2.4 | length 635
  Top Layer w5: v1(-474.28,124.92) -445.68,153.52 U2.4@-417.01,153.52
  Bottom Layer w5: v1(-474.28,124.92) -471.79,127.41 -465.28,127.41 -464.85,127.83 -218.7,127.83 -136.02,210.51 -136.02,242.99 -78.94,300.08 -0.08,300.08 P13.1@0,300
PMIC_RESETN: R5.1 U1.B15 U2.11 U3.4 | length 564.6
  Top Layer w5: U3.4@-337.36,1.32 -335.04,-1 -323.03,-1 -321.59,-2.44 -314.52,-2.44 v1@-292.03,20.06 ; U2.11@-320.56,112.18 -320.56,71.22 -292.52,43.19 ; v1(-292.52,20.55) -292.52,43.19 ; R5.1@-267.72,42 -268.91,43.19 -292.52,43.19
  Bottom Layer w5: v2(-581.89,-57.2) -581.89,-14.88 -556.3,10.71 -433.63,10.71 -385.4,58.94 -327.95,58.94 -292.52,23.5 v1(-292.52,20.55)
PMIC_SCL: R3.1 U1.E16 U2.5 | length 419.6
  Top Layer w5: U1.E16@-562.2,-116.26 -540.55,-94.61 -500.29,-94.61 -490.44,-104.45 -457.87,-104.45 -451.52,-98.09 -426,-72.57 -426,-43 -439.17,-29.83 -439.17,28.43 -463,52.25 -463,95.13 -453,105.13 -453,123 -438.23,137.77 U2.5@-417.01,137.77
PMIC_SDA: R4.1 U1.F16 U2.6 | length 419.8
  Top Layer w5: U1.F16@-562.2,-135.94 -508.07,-135.94 -502.17,-130.04 -447.05,-130.04 -416,-98.99 -416,-90.67 ; U2.6@-415.04,114.15 -440.16,89.03 -440.16,52.64 -424.41,36.89 -424.41,-28.59 -416,-37 -416,-90.67 ; R4.1@-391.23,-90.67 -416,-90.67
QSPI_CS: U1.T4 U6.1 | length 164.4
  Top Layer w5: U6.1@-838,-467 -814.38,-467 -798.43,-451.05 U1.T4@-798.43,-332.8
QSPI_D0: U1.T5 U6.5 | length 631.8
  Top Layer w5: U1.T5@-778.74,-332.8 -778.63,-332.8 -763.98,-347.45 -763.98,-527.98 -769.85,-533.85 -769.85,-618.2 v1(-770.87,-619.21) ; U6.5@-546.66,-617 -545.92,-616.26 v1(-491.34,-616.26)
  PWR w5: v1(-770.87,-619.21) -769.39,-617.74 -492.81,-617.74 v1(-491.34,-616.26)
QSPI_D1: U1.U5 U6.2 | length 213.7
  Top Layer w5: U6.2@-838,-517 -796,-517 -779,-500 -779,-352.74 U1.U5@-778.74,-352.48
QSPI_D2: U1.P6 U6.3 | length 483.1
  Top Layer w5: v1(-896.85,-568.03) -895.82,-567 U6.3@-838,-567 ; U1.P6@-759.06,-293.43 -759.06,-335.51 -753.43,-341.13 -753.43,-452.53 -753.37,-452.59 -753.37,-569.55 v1(-752.92,-570)
  PWR w5: v1(-896.85,-568.03) -895.87,-569.02 -753.9,-569.02 v1(-752.92,-570)
QSPI_D3: U1.P7 U6.7 | length 734.8
  Top Layer w5: v1(-736.93,-380.94) -736.42,-381.45 v1(-736.42,-599.53) ; U6.7@-546.66,-517 -545.83,-517.83 v1(-492.32,-517.83)
  Top Layer w6: U6.7@-570.28,-517 U6.7@-546.66,-517
  PWR w5: v1(-736.42,-599.53) -482.48,-599.53 -471,-588.05 -471,-539.16 v1(-492.32,-517.83)
  Bottom Layer w5: v2(-739.37,-293.43) -738.12,-294.68 -738.12,-379.75 v1(-736.93,-380.94)
QSPI_SCK: U1.T9 U6.6 | length 530.6
  Top Layer w5: v1(-718.93,-570.98) -717.72,-569.77 -717.72,-350.51 U1.T9@-700,-332.8
  Top Layer w6: U6.6@-546.66,-567 -493.35,-567 v1(-491.34,-569.02)
  PWR w6: v1(-718.93,-570.98) -717.95,-570 -492.32,-570 v1(-491.34,-569.02)
RST_3V3: J3.10 P20.1 R8.1 RESET1.2 U3.2 | length 1507.6
  Top Layer w5: R8.1@-440.16,-746.18 -348.62,-746.18 -331.89,-762.91 RESET1.2@-331.89,-780.63 ; U3.2@-247.24,-45.39 -208.86,-45.39 v1(-206.89,-47.36) ; J3.10@-163,-423 -163,-412 J3.10@-151,-400
  Top Layer w10: J3.10@-151,-400 v1(-110.16,-400)
  PWR w5: v1(-390.94,-747.17) -379.13,-735.35 -379.13,-473.54 -355.51,-449.92 -355.51,-423.35 -384.06,-394.8 -384.06,-334.76 -357.48,-308.19 -234.45,-308.19 -142.64,-400 v1(-110.16,-400)
  Bottom Layer w5: v1(-206.89,-47.36) -206.89,-303.27 v1(-110.16,-400)
  Bottom Layer w10: v1(-110.16,-400) P20.1@0,-400
SD_CLK: P25.1 U1.P10 | length 937
  Bottom Layer w5: v2(-680.31,-293.43) -680.31,-352.48 -654.8,-378 -494.36,-378 -462,-410.36 -462,-541.27 -363.39,-639.88 -363.39,-675.32 -200,-838.7 P25.1@-200,-937.5
SD_CMD: P30.1 U1.R9 | length 682.6
  Top Layer w5: v1(-700.4,-395.33) -700.98,-395.91 -700.98,-685.02 -644.88,-741.12 -644.88,-829.88 -657,-842 -677,-842 -700,-865 P30.1@-700,-937.5
  Bottom Layer w5: v1(-700.4,-395.33) -700,-394.93 v2(-700,-313.11)
SD_D0: P29.1 U1.R11 | length 669
  Top Layer w5: U1.R11@-660.63,-313.11 -684.13,-336.61 -684.13,-388.27 -683.9,-388.5 -683.9,-679.1 -600,-763 P29.1@-600,-937.5
SD_D1: P28.1 U1.T11 | length 682.4
  Top Layer w5: U1.T11@-660.63,-332.8 -674.13,-346.3 -674.13,-384.13 -673.9,-384.35 -673.9,-668.1 -500,-842 P28.1@-500,-937.5
SD_D2: P27.1 U1.U11 | length 721.1
  Top Layer w5: U1.U11@-660.63,-352.48 -660.63,-656.37 -491.92,-825.08 -443.94,-825.08 -400,-869.02 P27.1@-400,-937.5
SD_D3: P26.1 U1.T12 | length 850.2
  Top Layer w5: U1.T12@-640.94,-332.8 -640.94,-658.06 -489.83,-809.17 -436.22,-809.17 -393.9,-851.5 -314.17,-851.5 -290.55,-875.12 -290.55,-928.05 P26.1@-300,-937.5
  Bottom Layer w5: P26.1@-300,-937.5 P26.1@-287,-924.5
SD_DETECT_N: P24.1 U1.R13 | length 1053.9
  Top Layer w5: U1.R13@-621.26,-313.11 -606.5,-327.87 -606.5,-667.5 -479.43,-794.57 -431.14,-794.57 -387.01,-838.7 -165.7,-838.7 -127.31,-800.32 -0.31,-800.32 P24.1@0,-800
SD_RESET_N: P23.1 U1.T15 | length 1063.5
  Top Layer w5: U1.T15@-581.89,-332.8 -596.5,-347.4 -596.5,-654.5 -470.37,-780.63 -419.49,-780.63 -373.23,-826.89 -171.89,-826.89 -91.73,-746.73 -91.73,-720.59 -71.14,-700 P23.1@0,-700
SWCLK: J3.4 P22.1 U1.L17 | length 855.8
  Top Layer w5: U1.L17@-542.52,-234.37 -542.15,-234 v1(-479,-234) ; v1(-348.62,-330.83) -347.64,-330.83 -315.04,-363.43 -315.04,-420.96 J3.4@-313,-423 ; v1(-124.45,-505.12) -124.45,-574.69 -112.4,-586.73 -13.27,-586.73 P22.1@0,-600
  PWR w5: v1(-348.62,-330.83) -298.43,-330.83 -124.45,-504.8 v1(-124.45,-505.12)
  Bottom Layer w5: v1(-479,-234) -478.05,-234.95 -478.05,-252.95 -400.17,-330.83 v1@-346.05,-330.83
SWIO: J3.2 P21.1 U1.L15 | length 963.7
  Top Layer w5: U1.L15@-581.89,-234.37 -581.89,-251.07 -578.96,-254 -466.68,-254 v1(-456.89,-244.21) ; v1(-397.83,-435.16) -375,-435.16 -363,-423.16 -363,-423 -363,-356.8 -384.06,-335.75 v1(-384.06,-271.77) ; v1(-102.56,-520.79) -84.77,-503 -3,-503 P21.1@0,-500
  Bottom Layer w5: v1(-456.89,-244.21) -411.9,-244.21 v1@-384.2,-271.92 ; v1(-397.83,-435.16) -397.83,-531.61 -367.32,-562.13 -143.9,-562.13 v1(-102.56,-520.79)
SWO: J3.6 U1.L16 | length 497.7
  Top Layer w5: J3.6@-263,-423 -262.01,-423.99 v1(-262.01,-502.09)
  Bottom Layer w5: v2(-562.2,-234.37) -517.63,-234.37 -262.63,-489.37 -262.63,-501.47 v1(-262.01,-502.09)
TEMP_SENSE: TP1.1 U2.14 | length 124.8
  Top Layer w8: U2.14@-294.96,153.52 -262.52,153.52 -208.61,99.61 TP1.1@-192.44,99.61
VDD_CORE: C26.2 C27.2 C28.2 C29.2 C30.2 C31.2 C32.2 C33.2 C34.2 C35.2 R7.2 U1.C5 U1.D9 U1.F14 U1.J4 U1.J14 U1.P9 U1.R5 U1.R14 | length 2261.4
  Top Layer w10: U1.J4@-800.18,-194.32 -799.5,-195 U1.J4@-798.43,-195 v2(-778.74,-195) ; U1.D9@-701.07,-96.57 U1.D9@-700,-96.57 v2(-680.31,-96.57) ; v2(-621.26,-195) -603.65,-195 -603.33,-194.68 U1.J14@-603.33,-194.32 ; U1.R14@-601.57,-313.11 -601.19,-312.73 -601.19,-311.31 -601,-311.12 v2(-601,-294) ; R7.2@-303.8,433.73 R7.2@-303.8,435.7 ; v1(-303.35,416.22) -303.35,418.39 -305.66,420.7 -305.66,433.39 -303.57,435.47 -303.57,419.92 -303.8,419.69 -303.8,417.75 -302.27,416.22 v1(-262.01,416.22)
  PWR w10: v2(-778.74,-313.11) -726.57,-313.11 -707.27,-293.81 -700.38,-293.81 v2(-700,-293.43) -700,-258.98 ; v2(-778.74,-76.89) -778.74,-53.27 ; v2(-680.31,-96.57) -680.31,-67.05 -694.09,-53.27 -778.74,-53.27 ; v2(-601.57,-135.94) -601.57,-189.14 -607.43,-195 v2(-621.26,-195) -638.98,-195 -663.58,-219.61 -663.58,-250.12 -664.57,-251.1 ; v2(-601,-294) -600.94,-293.94 -600.94,-282.25 -611.42,-271.77 -643.9,-271.77 -664.57,-251.1 ; v1(-282.68,416.22) -284.21,414.69 -284.21,404.85 -397.83,291.22 -722.64,291.22 -843.02,170.84 -843.02,-19.12 ; -843.02,-19.12 -867.32,-43.43 -867.32,-169.41 -841.73,-195 v2(-778.74,-195) -763.98,-195 -700,-258.98 ; -843.02,-19.12 -808.87,-53.27 -778.74,-53.27 ; -700,-258.98 -692.13,-251.1 -664.57,-251.1
  Bottom Layer w10: C30.2@-801,-193 -799,-195 v2(-778.74,-195) -777.66,-195 -776.66,-194 C29.2@-759,-194 ; C33.2@-780,-55 -779.8,-55 -779.72,-55.08 -779.72,-75.36 -778.74,-76.35 v2(-778.74,-76.89) ; C32.2@-779.01,-294 -779.09,-294.08 -778.87,-294.08 -778.87,-312.98 v2(-778.74,-313.11) v2@-778.74,-312.57 ; v2(-700,-293.43) C27.2@-700,-273.74 ; C34.2@-699,-99 C34.2@-699,-99 -684.71,-99.08 -682.59,-96.96 -680.7,-96.96 v2(-680.31,-96.57) ; C28.2@-642,-194 -641,-195 v2(-621.26,-195) ; v2(-601.57,-135.94) -566.94,-135.94 C26.2@-566,-135 C35.2@-566,-163 ; v2(-601,-294) -601,-294.54 -600.4,-295.14 C31.2@-600.4,-315.08
pads on no net: F1.1 F2.1 F3.1 F4.1 F5.1 F6.1 J1.M1 J1.M2 J3.7 J3.8 J3.A U1.A7 U1.A9 U1.A11 U1.A17 U1.B2 U1.B3 U1.B7 U1.B9 U1.B17 U1.D7 U1.E2 U1.E17 U1.G1 U1.G3 U1.G15 U1.H2 U1.J2 U1.J3 U1.J15 U1.K4 U1.L3 U1.M14 U1.N15 U1.R7 U1.T1 U1.T3 U1.T7 U1.T8 U1.T13 U1.T16 U1.U3 U1.U7 U1.U9 U3.1
copper on no net: | length 0

## Polygon pours and split planes (outlines as drawn)
GND on PWR "GND_L03_P005" (solid, remove dead copper, pour order 5): -1608.46,712.48 -1608.47,-1100.51 125.79,-1100.51 125.79,712.48
+3v3 on PWR "+3V3_L03_P003" (solid, remove dead copper, pour order 3): -1309.25,-529.66 -267.91,-529.66 -267.91,191.81 -1309.25,191.81
VDD_CORE on PWR "VDD_CORE_L03_P002" (solid, remove dead copper, pour order 2): -801.38,-335.75 -801.38,-206.81 -907.68,-206.81 -907.68,444.76 -252.17,444.76 -252.17,199.68 -585.83,199.68 -585.83,2.83 -585.83,-334.76
GND on GND "GND_L02_P000" (solid, remove dead copper, pour order 0): -1553.35,686.89 -1553.35,-1126.1 180.91,-1126.1 180.91,686.89

## Keep-outs
Keep-Out Layer:
  the board outline again, w0.1

## Silkscreen, mask and mechanical layers (free items; w line width, h text height)
Top Overlay:
  text "11" at -162,482 h30
  text "1" at -1259,472 h30
  text "48" at -1341,411 h30 r270
  text "12" at -57,389 h30 r90
  text "16" at -57,-13 h30 r90
  text "Super Monkey" at -1335,-127 h110
  text "20" at -58,-413 h30 r90
  text "M" at -1332,-460 h650
  text "36" at -1340,-779 h30 r270
  text "24" at -57,-813 h30 r90
  text "35" at -1215,-874 h30
  text "25" at -213,-875 h30
Bottom Overlay:
  text "11" at -136.02,477.24 h30
  text "1" at -1234,471 h30
  text "48" at -1331,435 h30
  text "12" at -46,434 h30
  text "Super Monkey" at -97.64,319.76 h175
  text "RT685 Audio Platorm" at -78.34,236.5 h75
  text "REV B" at -98,99 h175
  text "M" at -740.35,28.43 h800
  text "16" at -43.5,-54.25 h30
  text "20" at -38,-361 h30
  text "1" at -850,-596.5 h30
  text "2021-09-02" at -936.22,-845.59 h80
  text "36" at -1332.87,-853.46 h30
  text "24" at -44,-853 h30
  text "W" at -90.75,-859.37 h350
  text "35" at -1234,-894 h30
  text "25" at -136,-895 h30
[8] Board Outline:
  drawing of 266 lines, arcs and shapes, not listed

## Text inside footprints (layer, text, board x,y; h text height)
SW1: Top Overlay "ON" at -1265,-724.3 h59.06
SW2: Top Overlay "ON" at -1135,-724.3 h59.06
SW3: Top Overlay "ON" at -1010,-724.3 h59.06